# Altium PCB PCB1_old.PcbDoc (part 2 of 2)
Units mil, origin at the board's own origin, x right, y up, seen from the top; angles counter-clockwise.
Board outline 3631 x 2044 mil, 4 copper layers (Top Layer, GND, VDD, Bottom Layer), stack 62.449 mil thick; 137 components, 90 nets, 469 pads, 29 vias.
Unrouted connection lines stored in the file: 180.
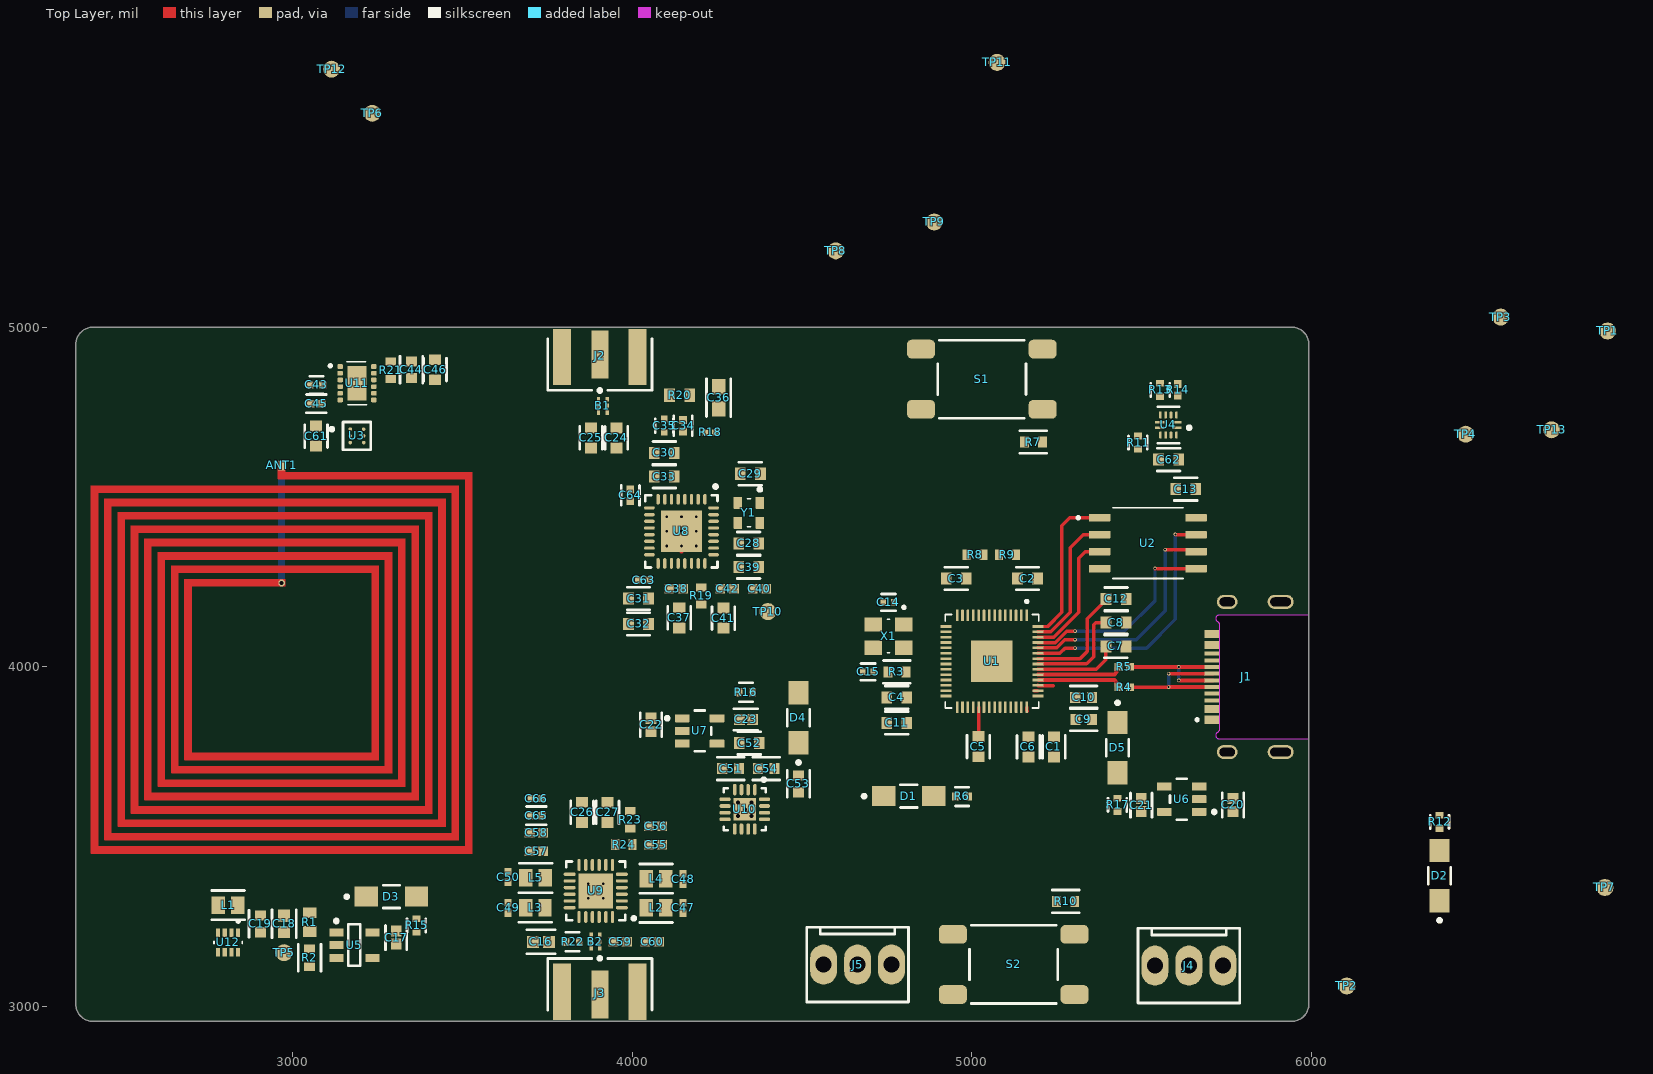
[diagram p0: Top Layer view]

## Via types
v1: diameter 19.68, hole 7.87, Top Layer to Bottom Layer, 13 vias
v2: diameter 10, hole 6, Top Layer to Bottom Layer, 10 vias
v3: diameter 19.68, hole 11.81, Top Layer to Bottom Layer, 5 vias
v4: diameter 20, hole 12, Top Layer to Bottom Layer, 1 vias

## Nets (pads, with @x,y where several pads share a name; then routed paths per layer and width w, separated by ;. In a path a pad name is that pad's centre, name@x,y a point inside that pad or via, vN(x,y) a via of type N, cw(c..) or ccw(c..) an arc to the next point about the centre after c; other vN are vias at no path point)
+3V3: C1.1 C2.1 C3.1 C4.1 C5.1 C6.1 C7.1 C8.1 C9.1 C13.1 C21.1 C28.1 C29.1 C44.1 C46.1 C53.1 C61.1 C62.1 R8.2 R9.2 R10.2 R11.2 R13.2 R17.2 R21.2 TP7.1 U1.1 U1.10 U1.22 U1.33 U1.42 U1.43 U1.44 U1.48 U1.49 U2.8 U3.A1 U4.12 U6.5 U8.28 U8.32 U10.16 U11.10 U11.12 Y1.4 | length 673.6
  Top Layer w10: C5.1 5020.51,3795.04 U1.33 ; U1.42 5162.24,3870.53 U1.42@5163.53,3869.24 ; U1.44@5184.65,3929.62 U1.44 ; U1.48 5367.61,3992.61 5395.47,4020.47 C7.1 ; U1.49 5338.36,4008.36 5360,4030 5360,4124.14 5365.86,4130 C8.1 ; C1.1 C1.1@5246.53,3789
+3V3A: C23.1 C30.1 C31.1 C32.1 C33.1 C51.1 C52.1 C54.1 C63.2 C64.1 R16.2 TP8.1 U7.5 U8.6 U8.10 U8.16 U8.17 U10.2 U10.3
+5: C17.1 C55.2 C56.2 C57.2 C58.2 C59.2 C60.2 C65.1 C66.2 R15.2 R22.2 R23.2 TP6.1 U5.5 U9.6 U9.13 U9.24
cpout: C34.1 C35.1 R18.1 U8.7
flash_cs: R7.1 U1.56 U2.1 | length 464.2
  Top Layer w10: U1.56 5223.6,4118.6 5265,4160 5265,4415 5289.05,4439.05 U2.1
GND: B1.2 B1.5 C1.2 C2.2 C3.2 C4.2 C5.2 C6.2 C7.2 C8.2 C9.2 C10.2 C11.2 C12.2 C13.2 C14.2 C15.2 C16.2 C17.2 C18.2 C19.2 C20.2 C21.2 C22.2 C23.2 C28.2 C29.2 C30.2 C31.2 C32.2 C33.2 C35.2 C36.2 C37.2 C38.1 C39.2 C40.1 C41.2 C42.1 C44.2 C46.2 C47.1 C48.1 C49.1 C50.1 C51.2 C52.2 C53.2 C54.2 C55.1 C56.1 C57.1 C58.1 C59.1 C60.1 C61.2 C62.2 C63.1 C64.2 C65.2 C66.1 D1.1 D2.1 D3.1 D4.1 D5.1 J1.A1_B12 J1.B1_A12 J1.SH1 J1.SH2 J1.SH3 J1.SH4 J2.2 J2.3 J2.4 J2.5 J3.2 J3.3 J3.4 J3.5 J4.1 J5.2 R2.2 R19.1 R20.1 R24.1 S1.1 S1.2 S2.1 S2.2 TP2.1 TP9.1 TP10.1 TP11.1 TP12.1 TP13.1 U1.19 U1.57 U2.4 U3.B1 U3.C1 U4.3 U4.5 U4.10 U4.11 U5.2 U6.2 U7.2 U8.8 U8.9 U8.11 U8.18 U8.21 U8.27 U8.31 U8.33 U9.1 U9.2 U9.5 U9.8 U9.11 U9.14 U9.17 U9.18 U9.20 U9.23 U9.25 U10.1 U10.4 U10.17 U11.6 U12.7 X1.2 X1.4 Y1.2 | length 0.7
  Top Layer w15: U8.33@4145.47,4340.47 U8.33@4145.47,4341.18
  other v1: 3871.38,3318.15 3914.68,3318.15 3871.38,3361.46 3914.68,3361.46 4102.2,4355.59 4145.51,4355.59 4188.82,4355.59 4102.2,4398.9 4145.51,4398.9 4188.82,4398.9 4102.2,4442.2 4145.51,4442.2 4188.82,4442.2
  other v3: 4312.24,3560.47 4351.61,3560.47 4331.93,3580.16 4312.24,3599.84 4351.61,3599.84
I_N: C48.2 L4.2 U10.7
I_O_N: L4.1 U9.4
I_O_P: L2.1 U9.3
I_P: C47.2 L2.2 U10.8
IQ_EN_N: R23.1 R24.2 U9.7
NetANT1_1: ANT1.1 C43.2 C45.1 C45.2 U11.5
  other v4: 2968,4247
NetB1_1: B1.1 J2.1
NetB1_3: B1.3 C25.2
NetB1_4: B1.4 C24.2
NetB2_1: B2.1 J3.1
NetC10_1: C10.1 C11.1 C12.1 U1.23 U1.45 U1.50 | length 377.7
  Top Layer w10: U1.45 5196.18,3944.31 5240.69,3944.31 ; U1.50 5319.11,4024.11 5340,4045 5340,4142.09 5395.94,4198.03 C12.1
NetC14_1: C14.1 U1.20 X1.1
NetC15_1: C15.1 R3.1 X1.3
NetC18_1: C18.1 C19.1 R1.2 TP5.1 U5.1 U5.3 U12.1
NetC34_2: C34.2 R20.2
NetC43_1: C43.1 U11.4
NetD1_2: D1.2 R6.1
NetD2_2: D2.2 R12.1
NetD3_2: D3.2 R15.1
NetD4_2: D4.2 R16.1
NetD5_2: D5.2 R17.1
NetJ1_A5: J1.A5 U4.1
NetJ1_A6: J1.A6 J1.B6 R5.2 | length 383.5
  Top Layer w11.2: R5.2 5467.06,3999.68 5610,3999.68 5709.69,3999.68 J1.B6@5710,3999.37 ; v2(5610,3960) J1.A6@5710,3960
  Bottom Layer w11.2: v2(5610,3960) v2(5610,4000)
NetJ1_A7: J1.A7 J1.B7 R4.2 | length 409.6
  Top Layer w10: R4.2 R4.2@5466.89,3940.16
  Top Layer w11.2: R4.2 v2@5579.84,3940 ; v2(5580,3940.16) 5687.29,3940.16 J1.B7@5706.93,3940.17 ; v2(5580.31,3979.68) J1.A7@5710,3979.68
  Bottom Layer w11.2: v2(5580,3940.16) 5580.31,3940.47 v2(5580.31,3979.68)
NetJ1_B5: J1.B5 U4.2
NetJ4_2: J4.2 U1.41
NetJ4_3: J4.3 U1.40
NetL1_1: L1.1 U12.3
NetL1_2: L1.2 U12.2
NetR1_1: R1.1 R2.1 U12.8
NetR3_2: R3.2 U1.21
NetR6_2: R6.2 U1.36
NetR7_2: R7.2 S1.3 S1.4
NetR11_1: R11.1 U1.8 U4.9
NetR13_1: R13.1 U1.7 U4.6
NetR14_2: R14.2 U4.4
NetR21_1: R21.1 U1.6 U11.11
NetR22_1: R22.1 U9.19
NetU1_5: U1.5 U11.1
NetU1_11: U1.11 U10.15
NetU1_12: U1.12 U10.13
NetU1_13: U1.13 U10.14
NetU1_15: U1.15 U10.12
NetU1_16: U1.16 U10.11
NetU1_18: U1.18 Y1.1
NetU1_28: U1.28 U8.4
NetU1_29: U1.29 U8.1
NetU1_30: U1.30 U8.2
NetU1_31: U1.31 U8.3
NetU1_32: U1.32 U8.30
NetU1_34: U1.34 U8.25
NetU1_35: U1.35 U8.26
NetU1_51: U1.51 U2.7 | length 757.9
  Top Layer w10: U1.51 5259.86,4039.86 5275,4055 v2(5305,4055) ; v2(5600,4390) 5600.95,4389.05 U2.7
  Bottom Layer w10: v2(5305,4055) 5515,4055 5600,4140 v2(5600,4390)
NetU1_52: U1.52 U2.6 | length 693.8
  Top Layer w10: U1.52 5250.17,4055.61 5274.57,4080 v2(5305,4080) ; v2(5570,4345) 5655.16,4345 U2.6
  Bottom Layer w10: v2(5305,4080) 5485,4080 5570,4165 v2(5570,4345)
NetU1_53: U1.53 U2.5 | length 612.6
  Top Layer w10: U1.53 5246.12,4071.35 5279.8,4105.03 v2(5304.98,4105.03) ; v2(5540,4290) 5540.95,4289.05 U2.5
  Bottom Layer w10: v2(5304.98,4105.03) 5450,4105 5540,4195 v2(5540,4290)
NetU1_54: U1.54 U2.3 | length 380.2
  Top Layer w10: U1.54 5242.07,4087.1 5315,4160.03 5315,4320 5334.05,4339.05 U2.3
NetU1_55: U1.55 U2.2 | length 412
  Top Layer w10: U1.55 5232.85,4102.85 5290,4160 5290,4350 5329.05,4389.05 U2.2
NetU8_29: U8.29 Y1.3
power_in: C16.1 C20.1 C22.1 J1.A4_B9 J1.B4_A9 R12.2 R14.1 TP4.1 U6.1 U6.3 U7.1 U7.3 U12.4 U12.5 U12.6
Q_N: C50.2 L5.2 U10.6
Q_O_N: L5.1 U9.15
Q_O_P: L3.1 U9.16
Q_P: C49.2 L3.2 U10.5
res_out_N: B2.4 U9.21
res_out_P: B2.3 U9.22
rf_ref_N: C27.2 U9.9
rf_ref_P: C26.2 U9.10
rfoutA_N: C25.1 U8.13
rfoutA_P: C24.1 U8.12
rfoutB_N: C27.1 U8.15
rfoutB_P: C26.1 U8.14
rset: R19.2 U8.22
run: R10.1 S2.3 S2.4 U1.26
SCL: R8.1 TP1.1 U1.3 U3.B2 U4.7 U11.8
SDA: R9.1 TP3.1 U1.2 U3.A2 U4.8 U11.7
swclk: J5.1 U1.24
swdio: J5.3 U1.25
temp: C37.1 C38.2 U8.19
temp_int: U1.4 U3.C2
USB_N: R5.1 U1.47 | length 253.7
  Top Layer w11.2: U1.47@5195.12,3977.5 5420.5,3977.5 5427.06,3984.06 5427.06,3994.77 5432.28,4000 R5.1
USB_P: R4.1 U1.46 | length 251.4
  Top Layer w11.2: U1.46@5196,3961 5420.5,3961 5427.06,3954.44 5427.06,3945.23 5432.28,3940 R4.1
vcom: C41.1 C42.2 U8.23
vref: C39.1 C40.2 U8.24
vtune: C36.1 R18.2 U8.20
pads on no net: B1.6 B2.2 B2.5 B2.6 J1.A8 J1.B8 U1.9 U1.14 U1.17 U1.27 U1.37 U1.38 U1.39 U5.4 U6.4 U7.4 U8.5 U9.12 U10.9 U10.10 U11.2 U11.3 U11.9 U11.13

## Polygon pours and split planes (outlines as drawn)
GND on GND (split plane): 287 vertices, not listed, extent 2382.1,2976.1 5972.9,4979.9
+3V3 on VDD (split plane): 287 vertices, not listed, extent 2382.1,2976.1 5972.9,4979.9

## Silkscreen, mask and mechanical layers (free items; w line width, h text height)
Top Solder:
  region: 3938.9,4738.51 3938.9,4795.51 3925.9,4795.51 3925.9,4738.51
  region: 3913.9,4755.51 3913.9,4781.51 3899.9,4781.51 3899.9,4755.51
  rectangle: 3038,4768 3100,4798
  rectangle: 3140,4775 3241,4896
Mechanical 1:
  lines w1.97: 2362,3006 ccw(c2412,3006) 2412,2956 5943,2956 ccw(c5943,3006) 5993,3006 5993,4950 ccw(c5943,4950) 5943,5000 2412,5000 ccw(c2412,4950) 2362,4950 2362,4922 2362,3006

## Text inside footprints (layer, text, board x,y; h text height)
J1: Mechanical 13 "PCB EDGE" at 5988.74,4225.91 h40 r90